# EAGLE board generator (EAGLE 7.6.0)
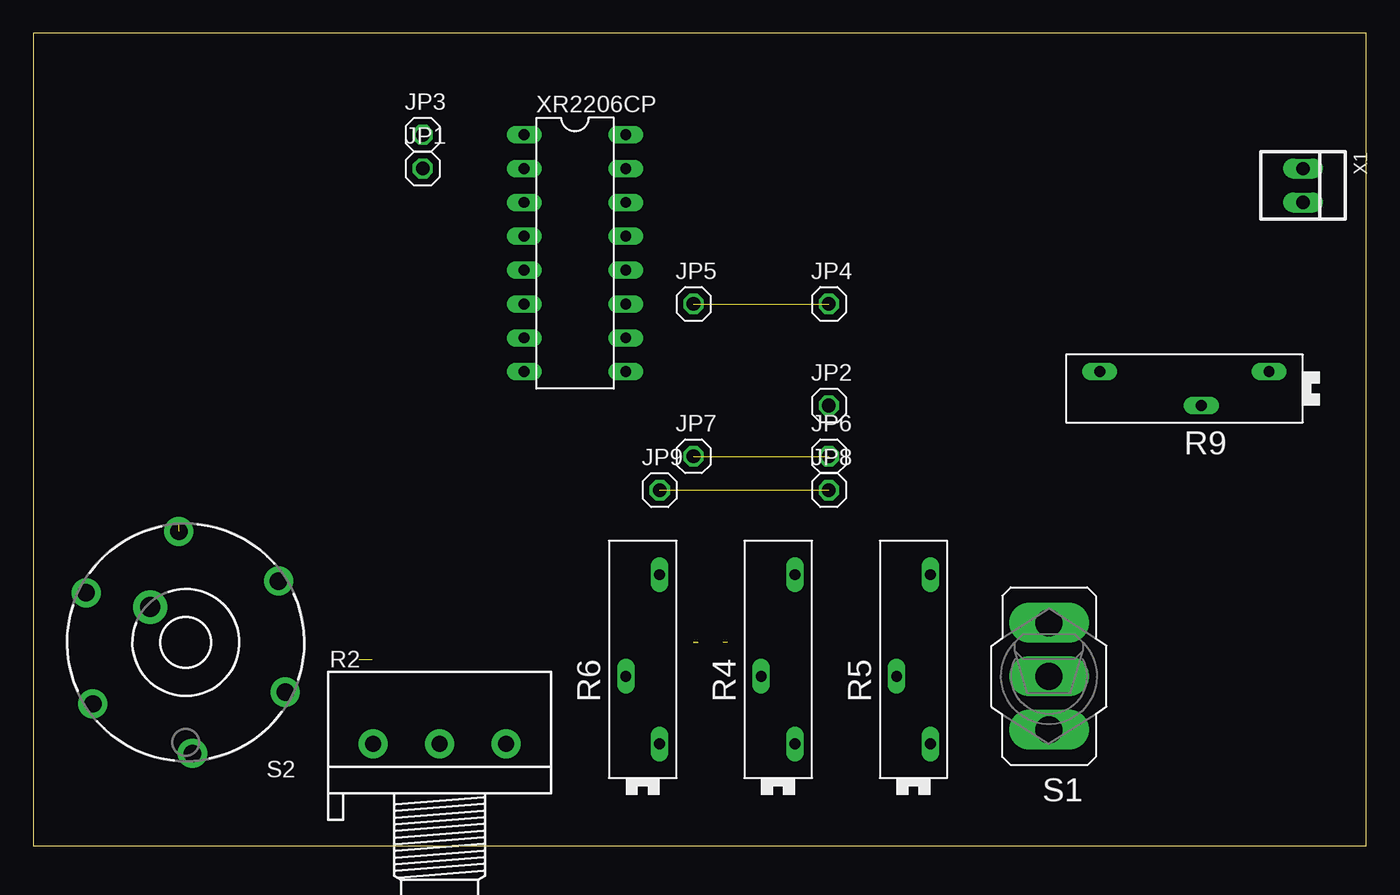
[diagram p0: board, top side]
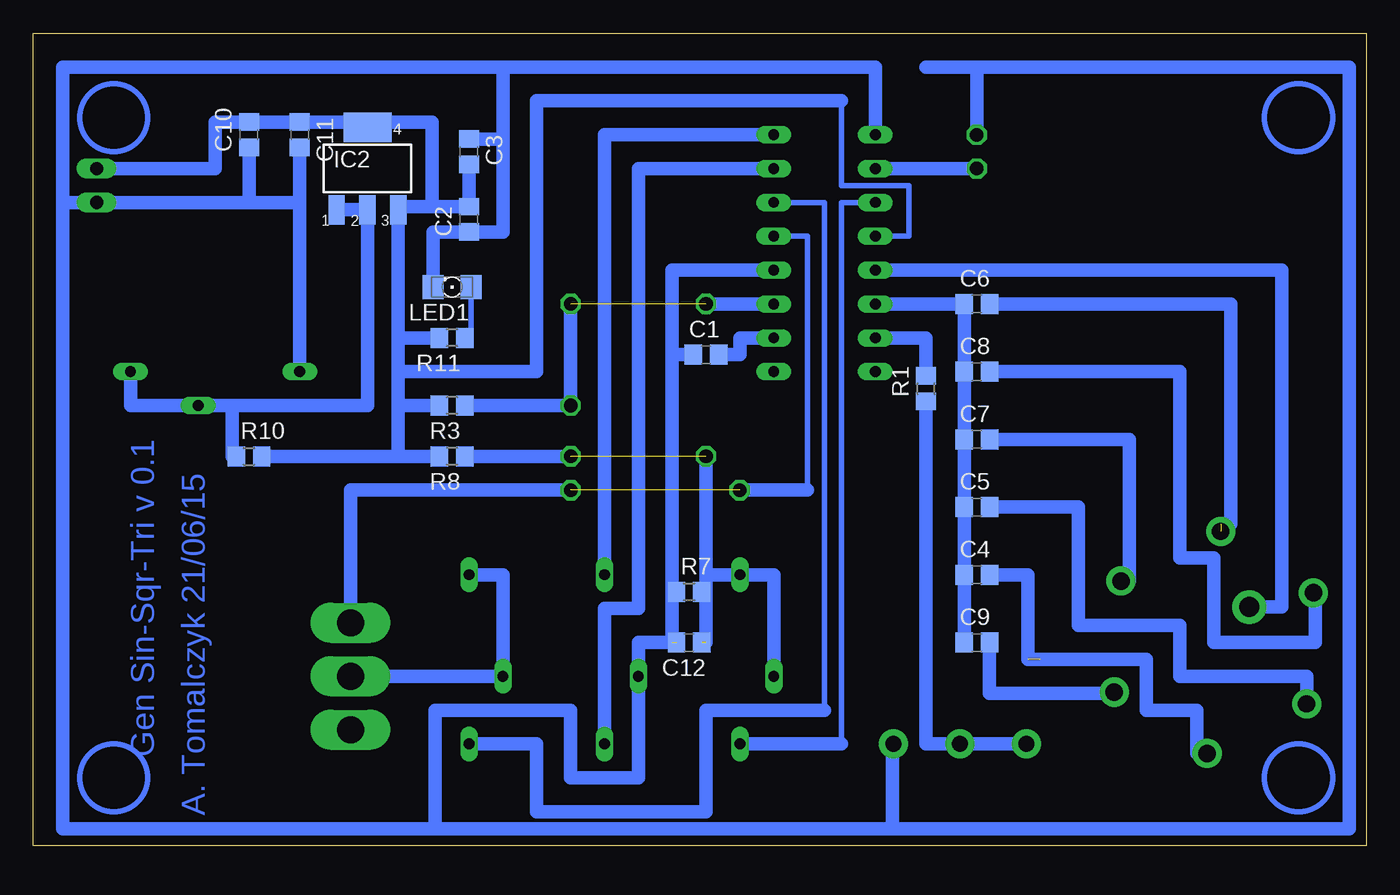
[diagram p1: board, bottom side, seen from below]

Size 100 x 60.95 mm. Coordinates in mm from the lower left corner, seen from the top.
Outline: 0,0 100,0 100,60.95 0,60.95 0,0
Copper layers (1*16): Top 0.035mm / dielectric 1.5mm / Bottom 0.035mm
Design rules "default": minimum track width 10mil, minimum drill 24mil, track to track 8mil, track to pad 8mil, pad to pad 8mil, via to via 8mil, smd to smd 8mil, copper to edge 40mil, drill to drill 8mil, minimum pad ring 10mil, minimum via ring 8mil, stop-mask expansion 4mil, vias tented up to drill 0mil, thermal gap 10mil

## Footprints (pad centres in the part's own frame; a part is rotated, then mirrored left to right if it is on the bottom)
C0805 = smd 1.3 x 1.5: 1 -0.95,0; 2 0.95,0
SOT223 = smd 1.219 x 2.235: 1 -2.311,-3.099; 2 0,-3.099; 3 2.311,-3.099 | smd 3.6 x 2.2: 4 0,3.099
1X01 = drill 1.016 octagon: 1 0,0
LED_1206 = smd 1.6 x 1.803: A -1.422,0; C 1.422,0
R0805 = smd 1.3 x 1.5: 1 -0.95,0; 2 0.95,0
3RP/1610N = drill 1.2 pad 2.184: 1 -5,0; 2 0,0; 3 5,0
PT-SPIN = drill 0.813 long: A -6.35,-1.27; E 6.35,-1.27; S -1.27,1.27
320-916 = drill 2.007 long: 1 0,4.013; 2 0,0; 3 0,-4.013
ELMA-01-1X6 = drill 1.3 pad 2.184: 1 -0.51,8.334; 3 6.963,4.609; 5 7.473,-3.726; 7 0.51,-8.334; 9 -6.963,-4.609; 11 -7.473,3.726 | drill 1.5 pad 2.54: A 2.652,-2.652
22-23-2021 = drill 1 long: 1 -1.27,0; 2 1.27,0
DIL16 = drill 0.813 long: 1 -8.89,-3.81; 2 -6.35,-3.81; 3 -3.81,-3.81; 4 -1.27,-3.81; 5 1.27,-3.81; 6 3.81,-3.81; 7 6.35,-3.81; 8 8.89,-3.81; 9 8.89,3.81; 10 6.35,3.81; 11 3.81,3.81; 12 1.27,3.81; 13 -1.27,3.81; 14 -3.81,3.81; 15 -6.35,3.81; 16 -8.89,3.81

## Placement (x,y rotation side)
C1  1uF  [C0805]  49.53,36.83 0 bottom
C2  1uF  [C0805]  67.31,46.99 90 bottom
C3  100nF  [C0805]  67.31,52.07 270 bottom
C4  10uF  [C0805]  29.21,20.32 0 bottom
C5  1uF  [C0805]  29.21,25.4 0 bottom
C6  10nF  [C0805]  29.21,40.64 0 bottom
C7  1nF  [C0805]  29.21,30.48 0 bottom
C8  100nF  [C0805]  29.21,35.56 0 bottom
C9  100pF  [C0805]  29.21,15.24 0 bottom
C10  100nF  [C0805]  83.82,53.34 90 bottom
C11  100uF  [C0805]  80.01,53.34 270 bottom
C12  10uF  [C0805]  50.8,15.24 180 bottom
IC2  317EMP  [SOT223]  74.93,50.8 0 bottom
JP1  [1X01]  29.21,50.8 0 top
JP2  [1X01]  59.69,33.02 0 top
JP3  [1X01]  29.21,53.34 0 top
JP4  [1X01]  59.69,40.64 0 top
JP5  [1X01]  49.53,40.64 0 top
JP6  [1X01]  59.69,29.21 0 top
JP7  [1X01]  49.53,29.21 0 top
JP8  [1X01]  59.69,26.67 0 top
JP9  [1X01]  46.99,26.67 0 top
LED1  ZIEL  [LED_1206]  68.58,41.91 180 bottom
R1  10k  [R0805]  33.02,34.29 90 bottom
R2  100k  [3RP/1610N]  30.48,7.62 0 top
R3  10k  [R0805]  68.58,33.02 180 bottom
R4  25k  [PT-SPIN]  55.88,13.97 90 top
R5  500R  [PT-SPIN]  66.04,13.97 90 top
R6  50k  [PT-SPIN]  45.72,13.97 90 top
R7  5.1k  [R0805]  50.8,19.05 0 bottom
R8  5.1k  [R0805]  68.58,29.21 180 bottom
R9  4.7k  [PT-SPIN]  86.36,34.29 180 top
R10  1k  [R0805]  83.82,29.21 0 bottom
R11  1k  [R0805]  68.58,38.1 180 bottom
S1  [320-916]  76.2,12.7 180 top
S2  ELMA-01-1X6  [ELMA-01-1X6]  11.43,15.24 180 top
X1  22-23-2021  [22-23-2021]  95.25,49.53 270 top
XR2206CP  [DIL16]  40.64,44.45 270 top

## Library data of the parts
C1-C12 R1 R3 R7 R8 R10 R11 = rcl
IC2 = linear
JP1-JP9 = pinhead
LED1 = eagle-ltspice; SPICEMODEL: NONE; SPICEPREFIX: D; SPICETYPE: diode
R2 R4-R6 R9 = pot
S1 S2 = switch
X1 = con-molex; MF: MOLEX; MPN: 22-23-2021; OC_FARNELL: 1462926; OC_NEWARK: 25C3832
XR2206CP = exar; OC_FARNELL: unknown; OC_NEWARK: unknown

## Nets
C2: C4.1 C5.1 C6.1 C7.1 C8.1 C9.1 XR2206CP.6
GND: C1.1 C2.1 C3.1 C10.1 C11.2 C12.2 JP3.1 LED1.C R2.3 R4.S R7.1 R9.E X1.2 XR2206CP.1 XR2206CP.12
N$1: C4.2 S2.1
N$2: S2.A XR2206CP.5
N$3: C5.2 S2.3
N$4: C8.2 S2.5
N$5: C6.2 S2.7
N$6: C7.2 S2.9
N$7: R1.2 XR2206CP.7
N$8: C9.2 S2.11
N$9: R1.1 R2.1 R2.2
N$10: C1.2 XR2206CP.10
N$11: C12.1 R6.E R6.S R7.2 R8.1
N$12: R4.A XR2206CP.15
N$13: R4.E XR2206CP.16
N$14: R5.A XR2206CP.14
N$15: S1.3 XR2206CP.13
N$16: R5.E R5.S S1.2
N$17: R6.A XR2206CP.3
N$18: LED1.A R11.1
N$19: IC2.1 R9.A R9.S R10.1
SIN_TRI: JP1.1 XR2206CP.2
SQR: JP2.1 R3.1 XR2206CP.11
VCC: C2.2 C3.2 C10.2 C11.1 IC2.3 IC2.4 R3.2 R8.2 R10.2 R11.2 X1.1 XR2206CP.4

## Tracks (layer width: path | path; a pad name or v marks a point on that pad's centre or on a via)
C2
  Bottom 1.016: XR2206CP.6 C6.1 C8.1 C7.1 C5.1 C4.1 C9.1
GND  (2 unrouted)
  Bottom 0.406: R2.3 35.56,7.62
  Bottom 1.016: 52.07,36.83 52.07,43.18 XR2206CP.12 | 35.56,7.62 35.56,1.27 | 35.56,1.27 69.85,1.27 | 69.85,1.27 69.85,10.16 59.69,10.16 59.69,5.08 54.61,5.08 R4.S 54.61,15.24 52.07,15.24 | C1.1 52.07,36.83 | R9.E 80.01,48.26 | 80.01,48.26 83.82,48.26 | 83.82,48.26 X1.2 97.79,48.26 | 80.01,48.26 C11.2 | C10.1 83.82,48.26 | LED1.C 70,46.04 C2.1 64.77,46.04 64.77,53.02 | XR2206CP.1 36.83,58.42 64.77,58.42 | C3.1 64.77,53.02 | 64.77,53.02 64.77,58.42 | 97.79,48.26 97.79,58.42 64.77,58.42 | 97.79,48.26 97.79,1.27 69.85,1.27 | 35.56,1.27 1.27,1.27 1.27,58.42 29.21,58.42 | 29.21,58.42 33.02,58.42 | JP3.1 29.21,58.42 | C12.2 52.07,15.24 | 52.07,36.83 52.07,19.05 | R7.1 52.07,19.05 | 52.07,19.05 52.07,15.24
N$1  (1 unrouted)
  Bottom 0.406: S2.1 12.7,6.91
  Bottom 1.016: 12.7,6.91 12.7,10.16 16.51,10.16 16.51,13.97 25.4,13.97 25.4,20.32 C4.2
N$2
  Bottom 1.016: S2.A 6.35,17.89 6.35,43.18 XR2206CP.5
N$3
  Bottom 1.016: C5.2 21.59,25.4 21.59,16.51 13.97,16.51 13.97,12.7 4.47,12.7 S2.3
N$4
  Bottom 0.406: 3.81,18.82 S2.5
  Bottom 1.016: 3.81,18.82 3.81,15.24 11.43,15.24 11.43,21.59 13.97,21.59 13.97,35.56 C8.2
N$5  (1 unrouted)
  Bottom 0.406: 10.92,24.13 10.16,24.13
  Bottom 1.016: 10.16,24.13 10.16,40.64 C6.2
N$6
  Bottom 0.406: S2.9 17.78,19.85
  Bottom 1.016: 17.78,19.85 17.78,30.48 C7.2
N$7
  Bottom 1.016: XR2206CP.7 33.02,38.1 R1.2
N$8
  Bottom 0.406: 18.9,11.43 S2.11
  Bottom 1.016: 18.9,11.43 28.26,11.43 C9.2
N$9
  Bottom 1.016: R2.1 R2.2 33.02,7.62 R1.1
N$10
  Bottom 1.016: XR2206CP.10 46.99,38.1 46.99,36.83 C1.2
N$11  (3 unrouted)
  Bottom 0.406: R7.2 49.53,17.78
  Bottom 1.016: R8.1 59.69,29.21 | R6.S 44.45,20.32 R6.E 49.53,20.32 | 49.53,29.21 49.53,20.32 | 49.53,20.32 49.53,17.78 49.53,15.24
N$12
  Bottom 1.016: R4.A 57.15,17.78 54.61,17.78 54.61,50.8 XR2206CP.15
N$13
  Bottom 1.016: XR2206CP.16 57.15,53.34 R4.E
N$14
  Bottom 0.406: XR2206CP.14 40.64,48.26 40.64,10.16
  Bottom 1.016: R5.A 62.23,7.62 62.23,2.54 49.53,2.54 49.53,10.16 40.64,10.16
N$15  (1 unrouted)
  Bottom 0.406: XR2206CP.13 41.91,45.72 41.91,26.67
  Bottom 1.016: S1.3 76.2,26.67 59.69,26.67 | 41.91,26.67 46.99,26.67
N$16
  Bottom 1.016: R5.E 64.77,20.32 R5.S S1.2
N$17
  Bottom 0.406: XR2206CP.3 39.37,48.26 39.37,7.62
  Bottom 1.016: 39.37,7.62 R6.A
N$18
  Bottom 0.406: R11.1 67.16,38.1 LED1.A
N$19
  Bottom 0.406: R10.1 85.09,29.21
  Bottom 1.016: 85.09,29.21 85.09,33.02 | 85.09,33.02 R9.S 92.71,33.02 R9.A | IC2.1 74.93,47.7 74.93,33.02 85.09,33.02
SIN_TRI
  Bottom 1.016: JP1.1 XR2206CP.2
SQR  (1 unrouted)
  Bottom 1.016: R3.1 JP2.1 59.69,40.64 | XR2206CP.11 49.53,40.64
VCC
  Bottom 0.406: XR2206CP.4 34.29,45.72 34.29,49.53 39.37,49.53 39.37,55.88 | 72.62,47.94 IC2.3
  Bottom 1.016: 73.66,54.29 C11.1 C10.2 86.36,54.29 86.36,50.8 X1.1 | 73.66,54.29 70.08,54.29 70.08,47.94 | 70.08,47.94 C2.2 C3.2 | R11.2 72.62,38.1 | 72.62,38.1 IC2.3 | R3.2 72.62,33.02 | 72.62,33.02 72.62,35.56 | 72.62,35.56 72.62,38.1 | R10.2 72.62,29.21 | 72.62,29.21 72.62,33.02 | R8.2 72.62,29.21 | 39.37,55.88 62.23,55.88 62.23,35.56 72.62,35.56 | IC2.4 73.66,54.29 | 70.08,47.94 72.62,47.94
(copper drawn outside any net)
  shapes: Bottom circle x4

## Text on the board
Bottom: Gen Sin-Sqr-Tri v 0.1 | A. Tomalczyk 21/06/15